# EAGLE board PCB_v5 (EAGLE 9.7.0)
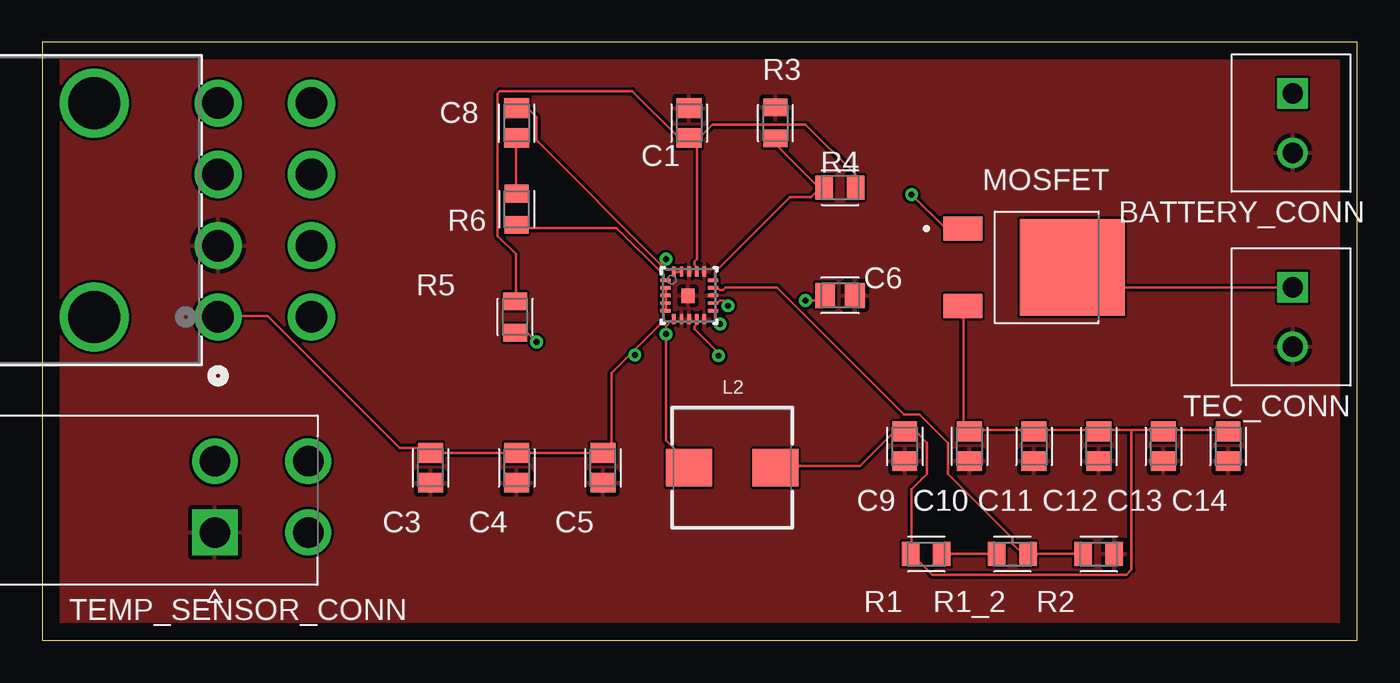
[diagram p0: board, top side]
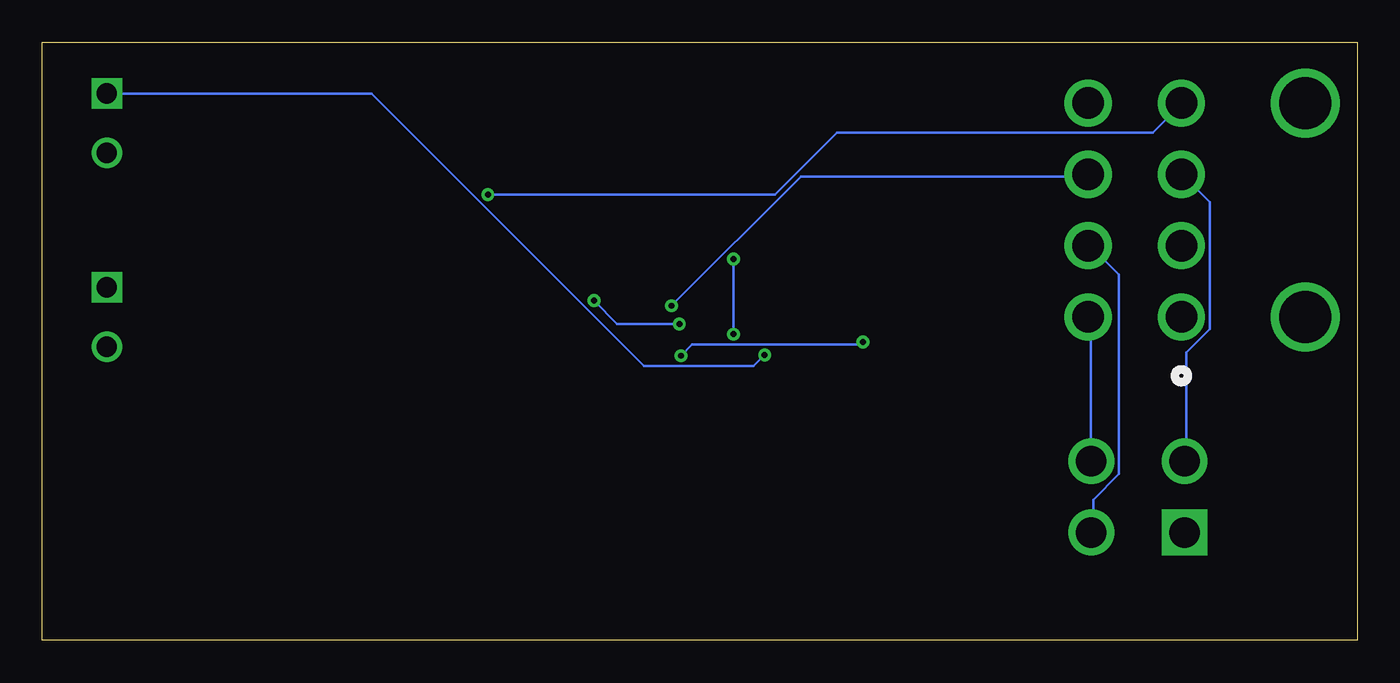
[diagram p1: board, bottom side, seen from below]

Size 77.45 x 35.23 mm. Coordinates in mm from the lower left corner, seen from the top.
Outline: 0,0 77.45,0 77.45,35.23 0,35.23 0,0
Copper layers (1*16): Top 0.035mm / dielectric 1.5mm / Bottom 0.035mm
Design rules "Fusion Electronics Design Rules": minimum track width 6mil, minimum drill 0.35mm, track to track 6mil, track to pad 6mil, pad to pad 6mil, via to via 6mil, smd to smd 6mil, copper to edge 40mil, drill to drill 6mil, minimum pad ring 10mil, minimum via ring 8mil, stop-mask expansion 4mil, vias tented up to drill 9999mil, thermal gap 10mil

## Footprints (pad centres in the part's own frame; a part is rotated, then mirrored left to right if it is on the bottom)
CONN_5569-08A_MOL = drill 1.854 pad 2.362: 1 0,0; 2 -4.2,0; 3 -8.4,0; 4 -12.6,0; 5 0,5.5; 6 -4.2,5.5; 7 -8.4,5.5; 8 -12.6,5.5 | drill 3.048 pad 3.048: 9 -12.6,-7.3; 10 0,-7.3
OST_OSTTE020104 = drill 1.2 square: 1 -1.75,0 | drill 1.2: 2 1.75,0
RJE0020A = smd 0.6 x 0.2: 1 -1.4,0.9; 2 -1.4,0.45; 3 -1.4,0; 4 -1.4,-0.45; 5 -1.4,-0.9; 11 1.4,-0.9; 12 1.4,-0.45; 13 1.4,0; 14 1.4,0.45; 15 1.4,0.9 | smd 0.2 x 0.6: 6 -0.9,-1.4; 7 -0.45,-1.4; 8 0,-1.4; 9 0.45,-1.4; 10 0.9,-1.4; 16 0.9,1.4; 17 0.45,1.4; 18 0,1.4; 19 -0.45,1.4; 20 -0.9,1.4 | smd 0.775 x 0.86: 21 -0.06,-0.018
CAPC2012X110 = smd 1.165 x 1.465: 1 -0.875,0; 2 0.875,0
WE-HCI_7050 = smd 2.7 x 2.2: 1 -2.55,0; 2 2.55,0
TRANS_TSM340N06CP_ROG = smd 2.29 x 1.4: 1 -4.19,2.285; 3 -4.19,-2.285 | smd 6.18 x 5.69: 2 2.245,0
RESC2012X65 = smd 1.031 x 1.42: 1 -0.919,0; 2 0.919,0
MOLEX_353180420 = drill 1.8 pad 2.3 square: 1 0,0 | drill 1.8 pad 2.3: 2 -4.2,0; 3 0,5.5; 4 -4.2,5.5

## Placement (x,y rotation side)
ARDUINO_CONN  39301080CONN_5569-08A_MOL  [CONN_5569-08A_MOL]  10.35,19.05 270 top
BATTERY_CONN  OSTTE020104  [OST_OSTTE020104]  73.66,30.48 270 top
BUCK_CONVERTER  TPS568230RJERRJE0020A  [RJE0020A]  38.1,20.32 0 top
C1  1µF  [CAPC2012X110]  38.1,30.48 90 top
C3  22µF  [CAPC2012X110]  22.86,10.16 90 top
C4  22µF  [CAPC2012X110]  27.94,10.16 90 top
C5  0.1µF  [CAPC2012X110]  33.02,10.16 90 top
C6  22nF  [CAPC2012X110]  46.99,20.32 0 top
C8  0.1µF  [CAPC2012X110]  27.94,30.48 270 top
C9  0.1µF  [CAPC2012X110]  50.8,11.43 90 top
C10  22µF  [CAPC2012X110]  54.61,11.43 90 top
C11  22µF  [CAPC2012X110]  58.42,11.43 90 top
C12  22µF  [CAPC2012X110]  62.23,11.43 90 top
C13  22µF  [CAPC2012X110]  66.04,11.43 90 top
C14  22µF  [CAPC2012X110]  69.85,11.43 90 top
L2  1.5uF  [WE-HCI_7050]  40.64,10.16 0 top
MOSFET  TSM340N06CP_ROG  [TRANS_TSM340N06CP_ROG]  58.42,21.97 0 top
R1  280k  [RESC2012X65]  52.07,5.08 0 top
R1_2  10k  [RESC2012X65]  57.15,5.08 0 top
R2  30k  [RESC2012X65]  62.23,5.08 0 top
R3  5.1k  [RESC2012X65]  43.18,30.48 270 top
R4  330k  [RESC2012X65]  46.99,26.67 180 top
R5  100K  [RESC2012X65]  27.85,19.05 270 top
R6  0  [RESC2012X65]  27.94,25.4 90 top
TEC_CONN  OSTTE020104  [OST_OSTTE020104]  73.66,19.05 270 top
TEMP_SENSOR_CONN  353180420  [MOLEX_353180420]  10.16,6.35 270 top

## Library data of the parts
ARDUINO_CONN = ArduinoConn; COPYRIGHT: Copyright (C) 2025 Ultra Librarian. All rights reserved.; MANUFACTURER_PART_NUMBER: 39301080; MFR_NAME: Molex Connector Corporation
BATTERY_CONN TEC_CONN = OSTTE020104; MANUFACTURER: On Shore Technology Inc.
BUCK_CONVERTER = 2025-04-09_12-58-25_Library; COPYRIGHT: Copyright (C) 2025 Ultra Librarian. All rights reserved.; MANUFACTURER_PART_NUMBER: TPS568230RJER; MFR_NAME: Texas Instruments; REFDES: RefDes; TYPE: TYPE
C1 C3-C6 C8-C14 = Tinkercad; CATEGORY: Capacitor
L2 = WE-HCI_7050
MOSFET = TSM340N06CP_ROG; MANUFACTURER: Taiwan Semiconductor; MAXIMUM_PACKAGE_HEIGHT: 2.40mm; PARTREV: A1701; STANDARD: Manufacturer Recommendations
R1 R1_2 R2-R6 = Tinkercad; CATEGORY: Resistor; SUB-CATEGORY: Fixed
TEMP_SENSOR_CONN = BatConn; MANUFACTURER: Molex; MAXIMUM_PACKAGE_HEIGHT: 11.40mm; PARTREV: B; STANDARD: Manufacturer Recommendations

## Nets
5V: ARDUINO_CONN.3 TEMP_SENSOR_CONN.2
COOLER_PWR: MOSFET.2 TEC_CONN.1
EN: ARDUINO_CONN.7 BUCK_CONVERTER.12
GND: ARDUINO_CONN.2 BATTERY_CONN.2 BUCK_CONVERTER.7 BUCK_CONVERTER.8 BUCK_CONVERTER.10 BUCK_CONVERTER.13 BUCK_CONVERTER.16 BUCK_CONVERTER.18 BUCK_CONVERTER.21 C1.2 C3.1 C4.1 C5.1 C6.2 C9.1 C10.1 C11.1 C12.1 C13.1 C14.1 R2.2 R3.1 TEC_CONN.2 TEMP_SENSOR_CONN.1
MODE: BUCK_CONVERTER.15 R3.2 R4.2
N$1: BUCK_CONVERTER.9 R5.2
N$2: BUCK_CONVERTER.11 C6.1
N$5: BUCK_CONVERTER.1 R6.1
N$6: C8.2 R6.2
N$8: BUCK_CONVERTER.14 R1_2.2 R2.1
N$9: R1.2 R1_2.1
PWM: ARDUINO_CONN.4 MOSFET.1
SCL: ARDUINO_CONN.5 TEMP_SENSOR_CONN.4
SDA: ARDUINO_CONN.6 TEMP_SENSOR_CONN.3
SW: BUCK_CONVERTER.6 BUCK_CONVERTER.19 BUCK_CONVERTER.20 C8.1 L2.1
UNUSED: ARDUINO_CONN.8
VCC: BUCK_CONVERTER.17 C1.1 R4.1 R5.1
VIN: ARDUINO_CONN.1 BATTERY_CONN.1 BUCK_CONVERTER.2 BUCK_CONVERTER.3 BUCK_CONVERTER.4 BUCK_CONVERTER.5 C3.2 C4.2 C5.2
VOUT: C9.2 C10.2 C11.2 C12.2 C13.2 C14.2 L2.2 MOSFET.3 R1.1

## Tracks (layer width: path | path; a pad name or v marks a point on that pad's centre or on a via)
5V
  Bottom 0.152: TEMP_SENSOR_CONN.2 10.06,10.57 10.06,16.97 8.69,18.34 8.69,25.81 10.21,27.33 ARDUINO_CONN.3
COOLER_PWR
  Top 0.152: 62.03,22.07 60.76,22.07 MOSFET.2 62.03,22 63.25,20.78 73.61,20.78 TEC_CONN.1
EN  (via drill 0.35)
  Top 0.152: v40.39,19.71 40.08,20.01 39.93,20.01 39.78,19.86 39.62,19.86 BUCK_CONVERTER.12
  Bottom 0.152: ARDUINO_CONN.7 15.85,27.33 32.77,27.33 v40.39,19.71
GND
  Top 0.152: BUCK_CONVERTER.8 38.1,19.05
  pour Top: -7.54,-24.05 156.13,-24.05 156.13,79.93 -10.08,79.93 -7.7,-15.49 -7.7,-13.95 -7.68,-13.93 -7.66,-13.91 -7.64,-13.89 -7.6,-13.89 -7.58,-13.91 -7.56,-13.93 -7.54,-13.95 -7.54,-21.59 -7.54,-21.6 -7.54,-21.6
MODE
  Top 0.152: BUCK_CONVERTER.15 39.62,21.23 39.62,21.69 44.04,26.11 45.26,26.11 45.72,26.57 45.87,26.57 | 45.87,26.57 46.03,26.57 R4.2 45.87,26.57 | 45.87,26.57 43.28,29.16 43.28,29.46 R3.2
N$1  (via drill 0.35)
  Top 0.152: v39.83,16.76 39.9,16.84 38.41,18.34 38.41,18.49 38.56,18.64 38.56,18.8 BUCK_CONVERTER.9 | R5.2 27.89,18.19 28.5,18.19 v29.11,17.58
  Bottom 0.152: v39.83,16.76 39.17,17.42 29.26,17.42 v29.11,17.58
N$2  (via drill 0.35)
  Top 0.152: v39.93,18.64 39.62,18.95 39.62,19.41 BUCK_CONVERTER.11 | v44.96,20.01 45.72,20.01 46.03,20.32 C6.1
  Bottom 0.152: v39.93,18.64 43.59,18.64 v44.96,20.01
N$5
  Top 0.152: R6.1 28.04,24.43 28.19,24.28 33.83,24.28 36.58,21.54 36.58,21.23 BUCK_CONVERTER.1
N$6
  Top 0.152: R6.2 27.89,26.42 27.89,29.46 C8.2
N$8
  Top 0.152: BUCK_CONVERTER.14 39.62,20.78 39.78,20.78 39.93,20.63 40.08,20.63 40.23,20.78 43.28,20.78 50.75,13.31 51.66,13.31 53.34,11.63 53.34,9.8 57.15,5.99 57.15,5.69 57.76,5.08 R1_2.2 R2.1
N$9
  Top 0.152: R1_2.1 R1.2
PWM  (via drill 0.35)
  Top 0.152: v51.21,26.26 53.19,24.28 54.1,24.28 MOSFET.1
  Bottom 0.152: ARDUINO_CONN.4 10.36,31.6 12.04,29.92 30.63,29.92 34.29,26.26 v51.21,26.26
SCL
  Bottom 0.152: TEMP_SENSOR_CONN.4 15.7,10.57 15.7,18.95 ARDUINO_CONN.5
SDA
  Bottom 0.152: TEMP_SENSOR_CONN.3 15.54,6.45 15.54,8.28 14.02,9.8 14.02,21.54 15.7,23.22 ARDUINO_CONN.6
SW  (via drill 0.35)
  Top 0.152: BUCK_CONVERTER.6 37.19,18.8 37.03,18.8 36.73,18.49 v36.73,18.03 36.73,11.79 37.95,10.57 37.95,10.26 L2.1 | BUCK_CONVERTER.19 37.64,21.69 37.19,21.69 BUCK_CONVERTER.20 37.19,21.84 36.73,21.84 36.42,22.15 | C8.1 28.04,31.29 28.65,31.29 29.11,30.84 29.11,29.46 36.42,22.15 | 36.42,22.15 v36.73,22.45
  Bottom 0.152: v36.73,18.03 v36.73,22.45
VCC
  Top 0.152: 38.25,29.31 38.56,29.01 38.56,22.45 38.41,22.3 38.41,22.15 38.56,22 38.56,21.84 BUCK_CONVERTER.17 | C1.1 38.1,29.46 38.25,29.31 | R5.1 27.89,20.01 27.89,22.76 26.82,23.82 26.82,32.21 26.97,32.36 34.75,32.36 37.49,29.62 38.1,29.62 C1.1 | 38.25,29.31 38.41,29.31 39.47,30.38 44.96,30.38 47.85,27.48 47.85,26.72 R4.1 | 38.25,29.31 C1.1
VIN  (via drill 0.35)
  Top 0.152: 36.73,19.86 36.73,19.41 BUCK_CONVERTER.5 36.58,19.41 36.58,18.8 34.75,16.97 | BUCK_CONVERTER.2 36.73,20.78 36.73,20.32 | 36.73,19.86 36.73,20.32 | 36.73,19.86 BUCK_CONVERTER.4 | BUCK_CONVERTER.3 36.73,20.32 | 34.75,16.97 33.53,15.75 33.53,11.63 33.07,11.18 C5.2 32.92,11.02 28.04,11.02 C4.2 27.89,11.02 22.86,11.02 C3.2 22.86,11.18 22.71,11.33 21.03,11.33 13.26,19.1 10.36,19.1 ARDUINO_CONN.1 | 34.75,16.97 v34.9,16.82
  Bottom 0.152: BATTERY_CONN.1 73.61,32.21 58.06,32.21 42.01,16.16 39.22,16.16 35.56,16.16 v34.9,16.82
VOUT
  Top 0.152: 70,12.31 C14.2 69.8,12.39 66.14,12.39 C13.2 65.99,12.39 64.16,12.39 | 51.21,5.08 51.21,8.89 52.12,9.8 52.12,11.63 51.51,12.24 50.9,12.24 C9.2 50.75,12.24 50.14,12.24 48.16,10.26 43.28,10.26 L2.2 | 64.16,12.39 62.33,12.39 C12.2 62.18,12.39 58.52,12.39 C11.2 58.37,12.39 54.71,12.39 C10.2 54.56,12.39 54.25,12.7 54.25,19.56 MOSFET.3 | 51.21,5.08 52.43,3.86 63.86,3.86 64.16,4.17 64.16,12.39 | R1.1 51.21,5.08